# EAGLE board Ingenious Bojo (EAGLE 9.7.0)

Size 143.01 x 47.45 mm. Coordinates in mm from the lower left corner, seen from the top.
Outline: 0,0 143.01,0 143.01,47.45 0,47.45 0,0
Copper layers (1*16): Top 0.035mm / dielectric 1.5mm / Bottom 0.035mm
Design rules "default": minimum track width 6mil, minimum drill 0.35mm, track to track 6mil, track to pad 6mil, pad to pad 6mil, via to via 6mil, smd to smd 6mil, copper to edge 40mil, drill to drill 6mil, minimum pad ring 10mil, minimum via ring 8mil, stop-mask expansion 4mil, vias tented up to drill 0mil, thermal gap 10mil

## Footprints (pad centres in the part's own frame; a part is rotated, then mirrored left to right if it is on the bottom)
BATTERY-GENERIC = drill 1.118 pad 3.15 octagon: + 2.54,0; - -2.54,0
7SEG-13 = drill 0.813 long: 1 -5.08,-7.62; 2 -2.54,-7.62; 3 0,-7.62; 4 2.54,-7.62; 5 5.08,-7.62; 6 5.08,7.62; 7 2.54,7.62; 8 0,7.62; 9 -2.54,7.62; 10 -5.08,7.62
RESAD1016W63L850D250B = drill 0.83 pad 1.43: 1 -5.08,0; 2 5.08,0
SWITCH-SPDT-PTH-8.5X3.7MM = drill 1.016 pad 1.88: 1 -2.54,0; 2 0,0; 3 2.54,0
TO220V = drill 1.016 long: 1 -2.54,-2.54; 2 0,-2.54; 3 2.54,-2.54
DIP762W53P254L1969H508Q16B = drill 0.743 pad 1.343: 1 -3.81,8.89; 2 -3.81,6.35; 3 -3.81,3.81; 4 -3.81,1.27; 5 -3.81,-1.27; 6 -3.81,-3.81; 7 -3.81,-6.35; 8 -3.81,-8.89; 9 3.81,-8.89; 10 3.81,-6.35; 11 3.81,-3.81; 12 3.81,-1.27; 13 3.81,1.27; 14 3.81,3.81; 15 3.81,6.35; 16 3.81,8.89

## Placement (x,y rotation side)
BAT1  9V  [BATTERY-GENERIC]  8.26,38.39 180 top
DIGIT2  7SEG-CK  [7SEG-13]  133.74,25.38 0 top
R1  220  [RESAD1016W63L850D250B]  101.51,31.24 0 top
R2  220  [RESAD1016W63L850D250B]  101.51,16 0 top
R3  220  [RESAD1016W63L850D250B]  101.51,26.16 0 top
R4  220  [RESAD1016W63L850D250B]  101.51,21.08 0 top
R5  220  [RESAD1016W63L850D250B]  101.51,18.54 0 top
R6  220  [RESAD1016W63L850D250B]  101.51,28.7 0 top
R7  220  [RESAD1016W63L850D250B]  101.51,23.62 0 top
R8  1k  [RESAD1016W63L850D250B]  43.42,9.16 90 top
R9  1k  [RESAD1016W63L850D250B]  66.56,9.35 90 top
R10  1k  [RESAD1016W63L850D250B]  78.22,8.97 90 top
R11  1k  [RESAD1016W63L850D250B]  55.46,9.54 90 top
S1  TOGGLE  [SWITCH-SPDT-PTH-8.5X3.7MM]  75.49,31.11 0 top
S2  TOGGLE  [SWITCH-SPDT-PTH-8.5X3.7MM]  40.79,30.8 0 top
S3  TOGGLE  [SWITCH-SPDT-PTH-8.5X3.7MM]  52.56,30.95 0 top
S4  TOGGLE  [SWITCH-SPDT-PTH-8.5X3.7MM]  63.87,31.26 0 top
U1  LM7805_TO220V  [TO220V]  28.39,44.28 0 top
U2  CD4511_PDIP  [DIP762W53P254L1969H508Q16B]  92.62,24.89 0 top

## Library data of the parts
BAT1 R1-R11 S1-S4 U1 U2 = Tinkercad
DIGIT2 = Tinkercad; CATEGORY: Opto-Electronic; SUB-CATEGORY: Display; TYPE: 7-Segment

## Nets
BAT1+: BAT1.+ U1.1
BAT1-: BAT1.- DIGIT2.3 R8.1 R9.1 R10.1 R11.1 U1.2 U2.5 U2.8
DIGIT2_A: DIGIT2.7 R3.2
DIGIT2_B: DIGIT2.6 R7.2
DIGIT2_C: DIGIT2.4 R4.2
DIGIT2_D: DIGIT2.2 R5.2
DIGIT2_E: DIGIT2.1 R2.2
DIGIT2_F: DIGIT2.9 R1.2
DIGIT2_G: DIGIT2.10 R6.2
U2_!BL: S1.2 S2.2 S3.2 S4.2 U1.3 U2.3 U2.4 U2.16
U2_A: R3.1 U2.13
U2_B: R7.1 U2.12
U2_C: R4.1 U2.11
U2_D: R5.1 U2.10
U2_E: R2.1 U2.9
U2_F: R1.1 U2.15
U2_G: R6.1 U2.14
U2_IA: R10.2 S1.3 U2.7
U2_IB: R9.2 S4.3 U2.1
U2_IC: R11.2 S3.3 U2.2
U2_ID: R8.2 S2.3 U2.6

## Tracks (layer width: path | path; a pad name or v marks a point on that pad's centre or on a via)
BAT1+  (1 unrouted)
BAT1-  (8 unrouted)
DIGIT2_A  (1 unrouted)
DIGIT2_B  (1 unrouted)
DIGIT2_C  (1 unrouted)
DIGIT2_D  (1 unrouted)
DIGIT2_E  (1 unrouted)
DIGIT2_F  (1 unrouted)
DIGIT2_G  (1 unrouted)
U2_!BL  (7 unrouted)
U2_A  (1 unrouted)
U2_B  (1 unrouted)
U2_C  (1 unrouted)
U2_D  (1 unrouted)
U2_E  (1 unrouted)
U2_F  (1 unrouted)
U2_G  (1 unrouted)
U2_IA  (2 unrouted)
U2_IB  (2 unrouted)
U2_IC  (2 unrouted)
U2_ID  (2 unrouted)